# Altium PCB RF Board - Commercial China.PcbDoc
Units mil, origin at the board's own origin, x right, y up, seen from the top; angles counter-clockwise.
Board outline 2000 x 1000 mil, 2 copper layers (Top Layer, Bottom Layer); 17 components, 17 nets, 58 pads, 9 vias.
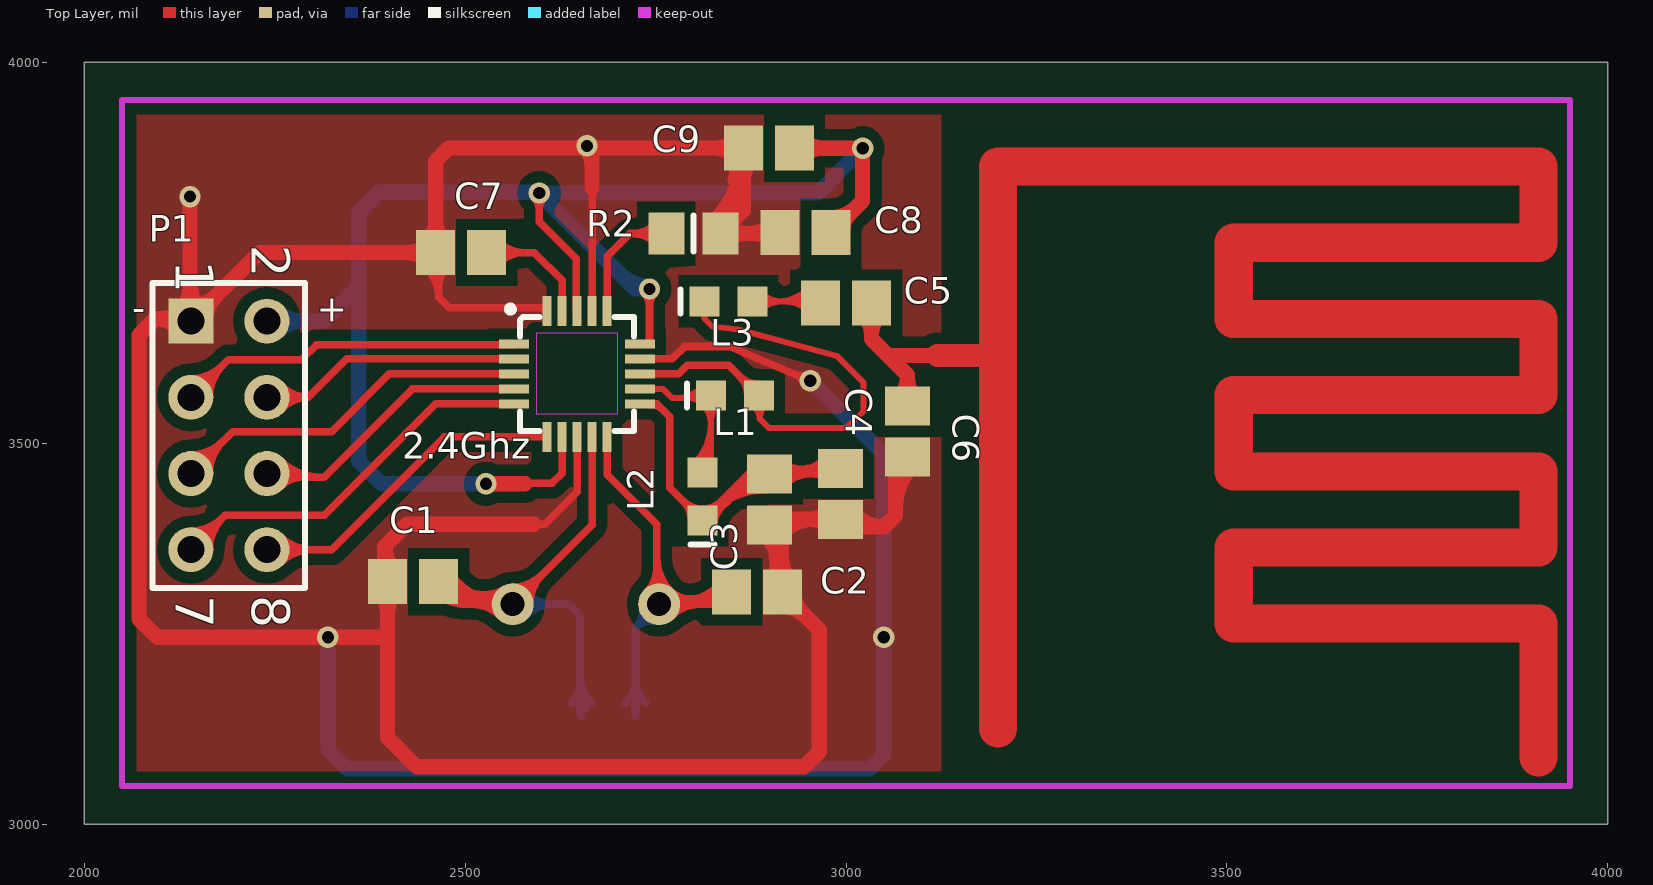
[diagram p0: Top Layer view]
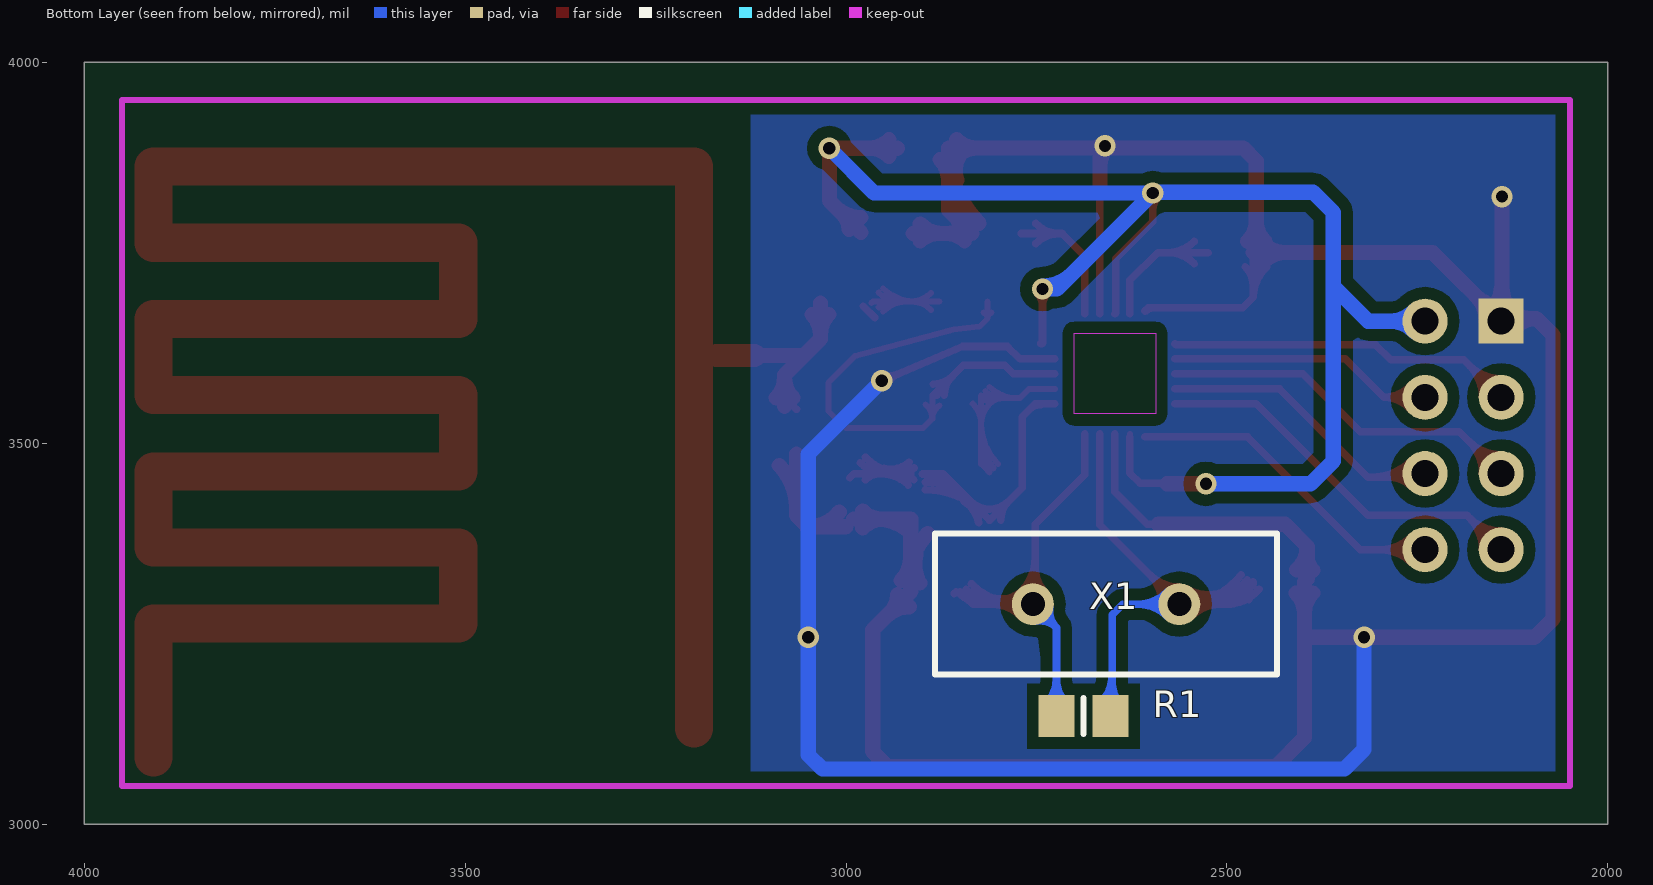
[diagram p1: Bottom Layer view, seen from below]

## Layer stack, top to bottom
Top Layer: signal copper 1.4
Dielectric: dielectric 12.6, FR-4, Dk 4.8
Bottom Layer: signal copper 1.4

## Board outline
2000,3000 4000,3000 4000,4000 2000,4000

## Design rules (kind name [scope] priority, off if disabled: settings)
Clearance "Polygon Clearance" [InPolygon] p1: gap=15
Clearance [All] p2: gap=8.1
HoleSize [All] p1: absolutevalues=TRUE maxlimit=100 minlimit=16 maxpercent=80.000 minpercent=20.000
MinimumAnnularRing [All] p1: minimumring=6
PolygonConnect [All] p1: connectstyle=Direct reliefconductorwidth=10 reliefentries=4 polygonreliefangle="90 Angle"
RoutingVias [All] p1: holewidth=16 width=28 viastyle="Through Hole" minholewidth=16 minwidth=27 maxholewidth=16 maxwidth=35
SilkscreenOverComponentPads [All] p1: minsilkscreentomaskgap=10
SolderMaskExpansion [All] p1: expansion=4
Width [All] p1: maxlimit=50 minlimit=8 preferedwidth=8
26 further rules are at their usual default settings.

## Classes and differential pairs
component class "2.4Ghz Chip Board": P1
net class SPI[3..0]: SPI0 SPI1 SPI2 SPI3

## Components (designator, comment, footprint, x,y, rotation, side; value= is the part's Value field where it differs from the comment)
2.4Ghz "nRF24L01+" nRF24L01+ 2576.16,3630.12 r0 top (schematic designator "2.4Ghz Chip")
C1 "Cap Semi" CAPC2012N 2431.81,3318.02 r0 top
C2 "Cap Semi" CAPC2012N 2883.35,3304.68 r180 top
C3 "Cap Semi" CAPC2012N 2899.64,3425.9 r90 top
C4 "Cap Semi" CAPC2012N 2992.87,3433.15 r90 top
C5 "Cap Semi" CAPC2012N 3000.12,3683.85 r180 top
C6 "Cap Semi" CAPC2012N 3080.62,3514.92 r90 top
C7 "Cap Semi" CAPC2012N 2495,3750 r0 top
C8 "Cap Semi" CAPC2012N 2946.88,3776.47 r0 top
C9 "Cap Semi" CAPC2012N 2899.02,3887.01 r0 top
L1 "Inductor" INDC1608N 2854.06,3562.65 r0 top
L2 "Inductor" INDC1608N 2811.58,3430.04 r90 top
L3 "Inductor" INDC1608N 2845.77,3685.93 r0 top
P1 "Header 4X2" HDR2X4 2140,3660 r270 top
R1 "Res2" RESC2012N 2688.35,3141.5 r0 bottom
R2 "Res3" RESC2012N 2799.53,3775 r0 top
X1 "16Mhz" "HC-49U - Through Hole" 2658.63,3288.52 r0 bottom

## Footprints (in the part's own frame and the unit in brackets; to place one, negate y for a bottom-side part, rotate by r counter-clockwise, add the part's x,y. Pads: shape width x height; smd on the part's side, far side on the other; paste and mask are expansions set on the pad)
CAPC2012N [mm] "Chip Capacitor, Body 2.0x1.3mm, IPC Medium Density"
  rect 1.3x1.5 smd: 1(-0.85,0) 2(0.85,0)
  body extent -1.1,-0.72 1.1,0.72, height 1.1
"HC-49U - Through Hole" [mm] "Quartz Crystal, Thru-Hole; 2 Leads; Body 11.35 x 4.65 x 13.46 mm (LxWxH max)"
  round 1.4 hole 0.8: 1(-2.44,0) 2(2.44,0)
  silkscreen extent -5.7,-2.35 5.7,2.35
HDR2X4 [mm] "Connector; Header; 4x2 Position"
  rect 1.5x1.5 hole 0.9: 1(0,0)
  round 1.5 hole 0.9: 2(0,2.54) 3(2.54,0) 4(2.54,2.54) 5(5.08,0) 6(5.08,2.54) 7(7.62,0) 8(7.62,2.54)
  silkscreen extent -1.27,-1.27 8.89,3.81
INDC1608N [mm] "Chip Inductor, Body 1.6x0.8mm, IPC Medium Density"
  rect 1x1 smd: 1(-0.8,0) 2(0.8,0)
  silkscreen extent -1.6,-0.4 -1.6,0.4, body extent -0.87,-0.48 0.87,0.48, height 0.71
nRF24L01+ [mm]
  rect 1x0.29 smd: 1(-0.3,0) 2(-0.3,-0.5) 3(-0.3,-1) 4(-0.3,-1.5) 5(-0.3,-2) 11(3.9,-2) 12(3.9,-1.5) 13(3.9,-1) 14(3.9,-0.5) 15(3.9,0)
  rect 0.29x1 smd: 6(0.8,-3.1) 7(1.3,-3.1) 8(1.8,-3.1) 9(2.3,-3.1) 10(2.8,-3.1) 16(2.8,1.1) 17(2.3,1.1) 18(1.8,1.1) 19(1.3,1.1) 20(0.8,1.1)
  Keep-Out Layer region: 0.447,-2.334 3.152,-2.334 3.152,0.357 0.447,0.357
  silkscreen extent -0.49,-2.9 3.7,1.22
RESC2012N [mm] "Chip Resistor, Body 2.0x1.3mm, IPC Medium Density"
  rect 1.2x1.4 smd: 1(-0.9,0) 2(0.9,0)
  silkscreen extent 0,-0.6 0,0.6, body extent -1.07,-0.7 1.07,0.7, height 0.65

## Part data
C1 C2 C3 C4 C5 C6 C7 C8 C9: "Capacitor (Semiconductor SIM Model)"
P1: "Header, 4-Pin, Dual row"
R1 R2: "Resistor"
X1: library part XTAL, "Crystal Oscillator"

## Via types
v1: diameter 28, hole 16, Top Layer to Bottom Layer, 9 vias

## Nets (pads, with @x,y where several pads share a name; then routed paths per layer and width w, separated by ;. In a path a pad name is that pad's centre, name@x,y a point inside that pad or via, vN(x,y) a via of type N, cw(c..) or ccw(c..) an arc to the next point about the centre after c; other vN are vias at no path point)
3.3VCC: 2.4Ghz.7 2.4Ghz.15 2.4Ghz.18 C8.2 C9.2 P1.2 | length 2481.3
  Top Layer w8: 2.4Ghz.7 2.4Ghz.7@2627.34,3512.01
  Top Layer w10: 2579.2,3446.99 2614.06,3446.99 2627.34,3460.27 2.4Ghz.7 ; v1@2590.93,3821.77 cw(c2575.56,3806.4) 2597.29,3806.4 cw(c2619.02,3806.4) v1@2603.65,3821.77 ; v1(2597.29,3828.13) 2597.29,3790.56 2646.15,3741.7 2646.15,3670.37 2.4Ghz.18@2647.03,3669.49 ; v1@2735.72,3695.78 cw(c2720.35,3680.41) 2742.08,3680.41 cw(c2763.81,3680.41) v1@2748.44,3695.78 ; 2.4Ghz.15@2742.08,3635.69 ccw(c2749.25,3635.69) 2.4Ghz.15@2744.18,3630.62 ; v1(2742.08,3702.14) 2742.08,3631.08 2.4Ghz.15@2743.04,3630.12 ; v1@3021.77,3887.01 v1(3021.88,3886.9)
  Top Layer w20: v1(2527.51,3446.52) 2578.73,3446.52 ; C9.2 3021.77,3887.01 3021.77,3817.9 C8.2 ; C9.2@2943.51,3875.99 cw(c2970.12,3849.37) 2970.12,3887.01 cw(c2970.12,3924.65) C9.2@2943.51,3898.03 ; C8.2@2980.34,3796 ccw(c2980.34,3843.14) 3013.68,3809.81 ; C8.2@2995.94,3780.41 cw(c3024.07,3780.41) C8.2@3004.18,3800.3
  Bottom Layer w20: P1.2@2245,3665 P1.2 2314.81,3660 2360.4,3705.59 ; P1.2@2253.81,3646.19 cw(c2287.14,3612.86) 2287.14,3660 cw(c2287.14,3707.14) P1.2@2253.81,3673.81 ; v1(2527.51,3446.52) 2390.27,3446.52 2360.4,3476.39 2360.4,3705.59 ; 2703.16,3722.26 ccw(c2742.08,3761.18) v1@2742.08,3706.14 ; v1(2742.08,3702.14) 2723.28,3702.14 v1(2597.29,3828.13) ; v1(3021.88,3886.9) 2963.11,3828.13 v1(2597.29,3828.13) ; 2360.4,3705.59 2360.4,3802.76 2386.94,3829.3 2596.12,3829.3 v1(2597.29,3828.13)
CE: 2.4Ghz.1 P1.3 | length 605.4
  Top Layer w10: P1.3 2189.34,3609.34 2285.16,3609.34 2305.06,3629.24 2567.41,3629.24 2.4Ghz.1@2568.29,3630.12 ; P1.3@2140,3574.53 ccw(c2140,3609.6) 2164.8,3584.8 ccw(c2189.6,3560) P1.3@2154.53,3560 ; P1.3@2140,3584.53 ccw(c2140,3643.74) 2181.87,3601.87 ccw(c2223.74,3560) P1.3@2164.53,3560
GND: 2.4Ghz.8 2.4Ghz.14 2.4Ghz.17 2.4Ghz.20 C1.1 C2.1 C3.1 C4.1 C6.1 C7.1 C8.1 C9.1 P1.1 R2.2 | length 7561.2
  Top Layer w10: C7.1@2447.86,3730.67 cw(c2413.02,3691.46) 2465.47,3691.46 ; C7.1@2454.5,3738.15 cw(c2432.8,3713.72) 2465.47,3713.72 ; 2465.47,3705.86 cw(c2501.74,3705.86) C7.1@2476.1,3731.5 ; C7.1@2465.47,3750 2465.47,3691.6 2479.38,3677.69 2603.39,3677.69 2.4Ghz.20 ; 2590.13,3393.53 2604.63,3393.53 2647.03,3435.93 2.4Ghz.8 2.4Ghz.8@2647.03,3512.01 ; 2595.65,3677.69 cw(c2595.65,3661.42) 2.4Ghz.20@2607.16,3672.93 ; 2.4Ghz.17@2666.71,3669.49 2.4Ghz.17 2666.71,3835 ; 2.4Ghz.14@2725.77,3610.43 2.4Ghz.14 2771.89,3610.43 2788.11,3626.66 2847.13,3626.66 2847.19,3626.59 v1(2953.17,3581.7) ; C8.1@2911.95,3775 C8.1 ; C2.1@2914.53,3305 C2.1@2915,3305.47 ; v1@2944.83,3578.32 ccw(c2924.69,3570.17) 2933.16,3590.18 ccw(c2941.64,3610.18) v1@2949.79,3590.04 ; C4.1@2990,3400.47 C4.1@3000.47,3390
  Top Layer w20: 2100.85,3663.31 ccw(c2100.85,3699.15) 2126.19,3673.81 ccw(c2095.27,3704.73) 2139,3704.73 ; P1.1@2124.5,3648.12 ccw(c2093.71,3624.51) 2093.71,3663.31 ; 2139,3709.56 ccw(c2189.56,3709.56) P1.1@2153.81,3673.81 ; v1(2139,3823.46) P1.1@2139,3661 ; P1.1@2140,3679.53 ccw(c2140,3726.67) 2173.34,3693.34 ccw(c2206.67,3660) P1.1@2159.53,3660 ; C1.1@2387.32,3303.06 cw(c2360.71,3276.44) 2398.35,3276.44 cw(c2435.98,3276.44) C1.1@2409.37,3303.06 ; C1.1@2387.32,3332.98 ccw(c2369.75,3350.55) 2394.6,3350.55 ; C1.1@2408.57,3333.73 cw(c2435.19,3364.37) 2394.6,3364.37 ; 2423.75,3393.52 2394.6,3364.37 ; 2423.75,3393.53 2590.13,3393.53 ; C7.1@2450.51,3738.98 ccw(c2423.9,3712.36) 2423.9,3750 ccw(c2423.9,3787.64) C7.1@2450.51,3761.02 ; C7.1@2450.51,3764.96 ccw(c2423.9,3791.58) 2461.54,3791.58 ccw(c2499.17,3791.58) C7.1@2472.56,3764.96 ; C7.1@2465.47,3750 C7.1 ; 2643.41,3887.13 ccw(c2643.41,3906.59) v1@2657.17,3892.83 ; v1@2657.17,3887.17 cw(c2634.14,3864.14) 2666.71,3864.14 ; v1@2662.83,3892.83 ccw(c2676.59,3906.59) 2676.59,3887.13 ; 2666.71,3835 2666.71,3883.29 v1@2662.87,3887.13 ; R2.2@2825.33,3788.57 ccw(c2728.21,3885.69) C9.1@2865.56,3885.69 ; 2827.63,3887.13 cw(c2827.63,3849.08) C9.1@2854.53,3875.99 ; 2828.21,3887.13 ccw(c2828.21,3924.36) C9.1@2854.53,3898.03 ; R2.2@2834.96,3792.56 ccw(c2834.96,3834.95) 2864.94,3804.98 ; R2.2@2839.47,3774.43 ccw(c2776.5,3837.4) 2865.56,3837.4 ; R2.2@2844.59,3765.37 cw(c2867.85,3742.11) 2867.85,3775 cw(c2867.85,3807.89) R2.2@2844.59,3784.63 ; R2.2@2848.58,3778.94 cw(c2871.96,3778.94) R2.2@2855.43,3795.47 ; C9.1@2852.05,3875.28 cw(c2821.46,3857.61) 2855.58,3848.47 ; C9.1@2854.53,3872.05 cw(c2827.92,3845.43) 2865.56,3845.43 cw(c2903.19,3845.43) C9.1@2876.58,3872.05 ; 2854.74,3845.31 cw(c2893.32,3834.98) C9.1@2873.35,3869.57 ; 2872.23,3775 ccw(c2872.23,3817.66) C8.1@2902.39,3787.49 ; 2879.33,3775 cw(c2879.33,3742.38) C8.1@2902.39,3765.45 ; C3.1@2892.55,3381.41 cw(c2838.36,3327.22) C2.1@2915,3327.22 ; C2.1@2903.31,3316.41 ccw(c2861.66,3340.46) 2908.12,3352.91 ; C2.1@2905.79,3319.64 ccw(c2883.56,3341.88) 2915,3341.88 ; 2911.94,3338.63 ccw(c2938.2,3345.66) C2.1@2924.61,3322.12 ; C8.1@2911.95,3775 R2.2 2865.56,3805.59 C9.1 2865.44,3887.13 v1@2662.87,3887.13 ; C2.1@2914.53,3305 2965,3254.53 2965,3095 2945,3075 2436.63,3075 2398.35,3113.28 2398.35,3244.28 ; C3.1@2914.6,3381.41 cw(c2960.62,3335.39) 2960.62,3400.47 ; C2.1@2915,3305.47 2915,3400.47 C4.1@2990,3400.47 ; 2915,3350.64 ccw(c2958.83,3350.64) C2.1@2927.84,3319.64 ; C2.1@2916.81,3285.15 cw(c2916.81,3242.76) 2946.79,3272.74 ; C2.1@2932.41,3300.74 ccw(c2965.29,3300.74) C2.1@2942.04,3277.49 ; 2949.39,3400.47 cw(c2949.39,3360.15) C4.1@2977.91,3388.66 ; 2953.19,3400.47 ccw(c2953.19,3435.42) C4.1@2977.91,3410.71 ; C4.1@3000.47,3390 3050,3390 ; C4.1@3008.89,3409.53 ccw(c3050,3443.01) 3050,3390 ; 3065,3415.61 cw(c3142.53,3415.61) C6.1@3087.71,3470.43 ; C6.1@3065,3485.47 3065,3405 3050,3390 ; 2093.71,3663.31 2136.69,3663.31 P1.1@2139,3661 ; 2093.71,3663.31 2072.1,3641.7 2072.1,3269.2 2096.3,3245 v1(2320,3245) 2397.63,3245 2398.35,3244.28 ; P1.1@2139,3661 2131.71,3653.71 P1.1 ; P1.1@2139,3661 P1.1 ; P1.1 2230,3750 C7.1 ; 2394.6,3364.37 2394.6,3321.77 C1.1 2398.35,3244.28 ; C7.1 2461.54,3870.29 2478.38,3887.13 v1@2660,3887.13 ; v1@2660,3887.13 v1(2660,3890) v1@2662.87,3887.13 ; v1@2660,3887.13 v1@2662.87,3887.13
  Bottom Layer w20: v1(2320,3245) 2320,3097.79 2345.69,3072.1 3030.85,3072.1 3049.61,3090.86 v1(3049.61,3245.14) 3049.61,3485.26 v1(2953.17,3581.7)
IRQ: 2.4Ghz.6 P1.8 | length 577.1
  Top Layer w10: P1.8 2325,3360 2473.07,3508.07 2.4Ghz.6 ; P1.8@2250.27,3349.73 cw(c2275.07,3324.93) 2275.07,3360 cw(c2275.07,3395.07) P1.8@2250.27,3370.27 ; P1.8@2257.34,3342.66 cw(c2299.21,3300.79) 2299.21,3360 cw(c2299.21,3419.21) P1.8@2257.34,3377.34
"Net2.4Ghz Chip_9": 2.4Ghz.9 C1.2 R1.1 X1.1 | length 1649.9
  Top Layer w10: C1.2@2457.99,3308.13 ccw(c2499.32,3341.89) 2499.32,3288.52 ; C1.2 2494.77,3288.52 ; C1.2@2465.73,3314.46 ccw(c2520.4,3359.11) 2520.4,3288.52 ; C1.2@2471.28,3294.39 cw(c2478.14,3271.89) 2494.77,3288.52 ; C1.2@2473.48,3320.78 ccw(c2541.48,3376.33) X1.1@2541.48,3288.52 ; C1.2@2481.22,3327.11 ccw(c2562.56,3393.54) X1.1 ; C1.2@2485.81,3312.59 ccw(c2516.61,3310.35) 2494.77,3288.52 ; 2515.43,3294.05 ccw(c2522.15,3325.7) X1.1@2545.97,3303.79 ; 2518.73,3293.35 cw(c2510.52,3254.71) X1.1@2543.65,3276.23 ; 2532.59,3290.41 ccw(c2537.16,3311.9) X1.1@2553.32,3297.02 ; X1.1@2543.02,3277.26 ccw(c2496.02,3250.2) 2510.05,3302.59 ccw(c2524.09,3354.97) X1.1@2551.26,3308.04 ; X1.1@2546.62,3272.57 ccw(c2508.1,3234.06) 2508.1,3288.52 ccw(c2508.1,3342.98) X1.1@2546.62,3304.47 ; X1.1@2551.68,3282.25 ccw(c2525.52,3267.19) 2533.33,3296.35 ccw(c2541.14,3325.51) X1.1@2556.27,3299.39 ; X1.1@2553.69,3279.64 ccw(c2532.25,3258.2) 2532.25,3288.52 ccw(c2532.25,3318.84) X1.1@2553.69,3297.4 ; X1.1@2562.57,3301.08 ccw(c2562.57,3331.4) 2584.01,3309.96 ccw(c2605.45,3288.52) X1.1@2575.13,3288.52 ; X1.1@2562.57,3311.08 ccw(c2562.57,3365.54) 2601.08,3327.03 ccw(c2639.59,3288.52) X1.1@2585.13,3288.52 ; 2.4Ghz.9@2666.71,3512.01 2.4Ghz.9 2666.71,3392.66 X1.1 ; 2494.77,3288.52 X1.1
  Bottom Layer w10: X1.1 2636.8,3288.52 2650.45,3274.87 2650.45,3143.97 R1.1 ; X1.1@2571.45,3279.64 cw(c2592.89,3258.2) 2592.89,3288.52 cw(c2592.89,3318.84) X1.1@2571.45,3297.4 ; X1.1@2578.52,3272.57 cw(c2617.03,3234.06) 2617.03,3288.52 cw(c2617.03,3342.98) X1.1@2578.52,3304.47 ; R1.1@2639.75,3158.6 ccw(c2613.92,3184.44) 2650.45,3184.44 ; 2650.45,3172.21 ccw(c2679.69,3172.21) R1.1@2659.01,3151.53 ; 2650.45,3196.35 ccw(c2703.83,3196.35) R1.1@2666.08,3158.6
"Net2.4Ghz Chip_10": 2.4Ghz.10 C2.2 R1.2 X1.2 | length 1150.1
  Top Layer w10: 2.4Ghz.10@2686.4,3512.01 2.4Ghz.10 2686.4,3458.6 2751.59,3393.41 2751.59,3291.63 X1.2 2833.73,3288.52 C2.2 ; X1.2@2738.74,3304.47 ccw(c2707.73,3335.48) 2751.59,3335.48 ; 2751.59,3326.34 ccw(c2792.52,3326.34) 2763.57,3297.4 ccw(c2785.01,3318.84) 2785.01,3288.52 ccw(c2785.01,3258.2) X1.2@2763.57,3279.64 ; 2751.59,3350.49 ccw(c2816.66,3350.49) 2770.64,3304.47 ccw(c2809.16,3342.98) 2809.16,3288.52 ccw(c2809.16,3234.06) X1.2@2770.64,3272.57 ; X1.2@2763.15,3297.81 ccw(c2779.86,3316.15) 2785.5,3291.99 ; X1.2@2769.88,3305.2 ccw(c2795.4,3333.21) 2804.02,3296.31 ; X1.2@2770.67,3288.52 ccw(c2770.67,3379.96) C2.2@2835.33,3315.3 ; X1.2@2773.86,3276.62 cw(c2809.58,3254.42) 2800.01,3295.38 ; 2794.81,3288.52 ccw(c2794.81,3355.82) C2.2@2842.4,3308.23 ; 2818.95,3288.52 ccw(c2818.95,3331.68) C2.2@2849.47,3301.16 ; C2.2@2855.47,3305 C2.2@2857.99,3302.48
  Bottom Layer w10: R1.2@2710.62,3158.6 ccw(c2678.83,3190.39) 2723.78,3190.39 ccw(c2768.74,3190.39) R1.2@2736.95,3158.6 ; R1.2 2723.78,3257.61 ; X1.2@2732.45,3284.76 cw(c2701.82,3279.58) 2723.78,3257.61 ; X1.2@2750.93,3266.28 ccw(c2745.75,3235.64) 2723.78,3257.61 ; X1.2 2723.78,3257.61
"Net2.4Ghz Chip_11": 2.4Ghz.11 C3.2 C4.2 L2.1 | length 1076.6
  Top Layer w10: 2.4Ghz.11@2725.77,3551.38 2751.83,3551.38 2768.58,3534.63 2768.58,3441.54 L2.1 2872.4,3459.36 C3.2 ; 2.4Ghz.11@2743.68,3550.67 cw(c2743.68,3529.28) 2758.8,3544.41 ; L2.1@2796.89,3398.54 ccw(c2761.44,3398.54) 2786.51,3423.61 ccw(c2811.58,3448.68) 2811.58,3413.23 ccw(c2811.58,3448.68) 2836.65,3423.61 ccw(c2861.72,3398.54) L2.1@2826.27,3398.54 ; L2.1@2814.63,3412.91 ccw(c2820.07,3438.59) 2834.38,3416.58 ; L2.1@2820.77,3407.74 cw(c2895.7,3332.81) C3.2@2895.7,3438.77 ; L2.1@2825.95,3395.5 cw(c2869.63,3386.24) 2845.29,3423.68 ; 2837.84,3424.81 cw(c2895.7,3366.95) C3.2@2895.7,3448.77 ; 2854.92,3441.88 cw(c2895.7,3401.09) C3.2@2895.7,3458.77 ; C3.2@2910.62,3467.27 ccw(c2926.17,3484.73) 2932.04,3462.1 ; C3.2@2911.07,3451.88 cw(c2929.54,3433.4) 2929.54,3459.53 ; C3.2@2915,3459.53 2990,3459.53 C4.2@2995,3454.53 ; C3.2@2917.27,3474.74 ccw(c2941.16,3501.56) 2950.16,3466.79 ; C3.2@2918.14,3444.8 cw(c2953.68,3409.26) 2953.68,3459.53 ; C3.2@2918.14,3473.92 ccw(c2952.89,3508.68) 2952.89,3459.53 ; C3.2@2921.32,3448.92 cw(c2950.95,3431.48) 2942.33,3464.76 ; C3.2@2922.11,3459.53 ccw(c2922.11,3533.43) C4.2@2974.37,3481.17 ; 2946.26,3459.53 ccw(c2946.26,3509.29) C4.2@2981.44,3474.1 ; 2956.33,3459.53 cw(c2956.33,3434.01) C4.2@2974.37,3452.05
"Net2.4Ghz Chip_12": 2.4Ghz.12 L1.1 L2.2 | length 489.8
  Top Layer w8: 2.4Ghz.12@2725.77,3571.07 2759.6,3571.07 2771.76,3558.9 L1.1@2818.81,3558.9 ; 2775.64,3558.9 ccw(c2775.64,3609.57) L1.1@2811.47,3573.74 ; 2793.75,3558.9 cw(c2793.75,3533.84) 2811.47,3551.56 cw(c2784.7,3524.78) 2822.56,3524.78 cw(c2860.43,3524.78) L1.1@2833.65,3551.56 ; 2794.96,3558.9 ccw(c2794.96,3590.26) L1.1@2817.13,3568.08 ; L2.2@2800.49,3472.63 ccw(c2747.2,3525.92) 2822.56,3525.92 ; L2.2@2806.15,3466.97 ccw(c2766.51,3506.61) 2822.56,3506.61 ; L2.2 2822.56,3472.52 L1.1 L1.1@2818.81,3558.9 ; L2.2@2811.8,3461.31 ccw(c2785.82,3487.29) 2822.56,3487.29 ; L1.1@2815.23,3555.32 L1.1@2818.81,3558.9
"Net2.4Ghz Chip_13": 2.4Ghz.13 L1.2 L3.1 | length 784.4
  Top Layer w8: L3.1@2808.85,3671.21 cw(c2805.97,3663.43) 2814.27,3663.43 ; L3.1 2814.27,3663.43 ; L3.1@2819.7,3671.21 ccw(c2822.57,3663.43) 2814.27,3663.43 ; L1.2@2877.08,3549.45 cw(c2865.81,3531.91) 2886.66,3531.91 cw(c2910.66,3531.91) L1.2@2895.48,3550.5 ; L1.2@2879.05,3562.65 2880.46,3562.65 L1.2 2886.66,3561.55 2886.66,3531.93 2898.77,3519.82 3000.89,3519.82 3023.13,3542.06 3023.13,3579.18 2987.86,3614.45 2858.77,3648.91 2824.77,3652.93 2814.27,3663.43
  Top Layer w10: 2.4Ghz.13@2725.77,3590.75 2780.68,3590.75 2791.88,3601.95 2846.26,3601.95 L1.2 L1.2@2880.46,3562.65 ; L1.2@2870.87,3562.65 ccw(c2835.42,3562.65) 2860.49,3587.72 ccw(c2885.56,3612.79) L1.2@2885.56,3577.34
"Net2.4Ghz Chip_16": 2.4Ghz.16 R2.1 | length 242.2
  Top Layer w10: 2.4Ghz.16@2686.4,3669.49 2686.4,3745.06 2716.34,3775 R2.1@2770,3775 ; R2.1@2750.93,3761.83 ccw(c2719.14,3730.04) 2719.14,3775 ccw(c2719.14,3819.96) R2.1@2750.93,3788.17
"Net2.4Ghz Chip_19": 2.4Ghz.19 C7.2 | length 240.1
  Top Layer w10: C7.2@2524.53,3750 2590.98,3750 2627.34,3713.64 2.4Ghz.19 2.4Ghz.19@2627.34,3669.49 ; C7.2@2543.02,3735.44 cw(c2578.17,3700.29) 2578.17,3750 cw(c2578.17,3799.71) C7.2@2543.02,3764.56
NetC5_1: C5.1 C6.2 | length 5018.3
  Top Layer w10: C6.2@3065,3544.53 C6.2@3070,3549.53
  Top Layer w20: C5.1@3022.56,3668.89 cw(c2995.95,3642.27) 3033.58,3642.27 cw(c3071.22,3642.27) C5.1@3044.61,3668.89 ; C5.1 3033.58,3636.42 3055,3615 ; C6.2@3069.6,3559.41 ccw(c3042.98,3586.02) 3080.62,3586.02 ccw(c3118.26,3586.02) C6.2@3091.64,3559.41 ; C6.2 3080.62,3589.38 3055,3615 ; 3120,3615 3055,3615
  Top Layer w30: 3120,3615 3170,3615
  Top Layer w50: 3199.28,3125.3 3199.28,3862.9 3908.95,3862.9 3908.95,3762.9 3508.95,3762.9 3508.95,3662.9 3908.95,3662.9 3908.95,3562.9 3508.95,3562.9 3508.95,3462.9 3908.95,3462.9 3908.95,3362.9 3508.95,3362.9 3508.95,3262.9 3908.95,3262.9 3908.95,3087.1
NetC5_2: C5.2 L3.2 | length 304.1
  Top Layer w8: L3.2 2964.58,3685.93 C5.2 ; L3.2@2888.36,3674.84 cw(c2915.13,3648.06) 2915.13,3685.93 cw(c2915.13,3723.8) L3.2@2888.36,3697.02 ; 2910.05,3685.93 ccw(c2910.05,3744.39) C5.2@2951.39,3703.05 ; 2919.01,3685.93 cw(c2919.01,3640.15) C5.2@2951.39,3672.52 ; 2929.36,3685.93 ccw(c2929.36,3725.08) C5.2@2957.05,3697.4 ; 2938.33,3685.93 cw(c2938.33,3659.46) C5.2@2957.05,3678.18
  Top Layer w10: C5.2@2962.42,3664.8 C5.2@2977.23,3679.61
SPI0: 2.4Ghz.2 P1.4 | length 478.6
  Top Layer w10: P1.4 2294.34,3560 ; P1.4@2250.9,3550.39 cw(c2272.18,3531.62) 2272.18,3560 cw(c2272.18,3588.38) P1.4@2250.9,3569.61 ; P1.4@2258.4,3543.78 cw(c2294.33,3512.09) 2294.33,3560 ; P1.4@2258.4,3576.22 ccw(c2294.33,3607.91) 2294.33,3560 ; 2.4Ghz.2@2568.29,3610.43 2344.77,3610.43 2294.34,3560
SPI1: 2.4Ghz.3 P1.5 | length 630.6
  Top Layer w10: P1.5 2195,3515 2325,3515 2400.75,3590.75 2.4Ghz.3@2568.29,3590.75 ; P1.5@2140,3474.53 ccw(c2140,3509.6) 2164.8,3484.8 ccw(c2189.6,3460) P1.5@2154.53,3460 ; P1.5@2140,3484.53 ccw(c2140,3543.74) 2181.87,3501.87 ccw(c2223.74,3460) P1.5@2164.53,3460
SPI2: 2.4Ghz.4 P1.6 | length 512.4
  Top Layer w10: P1.6 2245,3455 2315,3455 2431.07,3571.07 2.4Ghz.4@2568.29,3571.07 ; P1.6@2250.27,3470.27 ccw(c2287.14,3507.14) 2287.14,3455 ccw(c2287.14,3412.86) P1.6@2257.34,3442.66 ; P1.6@2257.34,3477.34 ccw(c2311.29,3531.29) 2311.29,3455
SPI3: 2.4Ghz.5 P1.7 | length 655.7
  Top Layer w10: P1.7 2185,3405 2315,3405 2461.38,3551.38 2.4Ghz.5@2568.29,3551.38 ; P1.7@2140,3374.53 ccw(c2140,3409.6) 2164.8,3384.8 ccw(c2189.6,3360) P1.7@2154.53,3360 ; P1.7@2140,3384.53 ccw(c2140,3443.74) 2181.87,3401.87 ccw(c2223.74,3360) P1.7@2164.53,3360

## Polygon pours and split planes (outlines as drawn)
GND on Top Layer "Top Layer-GND" (solid, pour order 4): 2025,3975 3125,3975 3125,3025 2025,3025
GND on Bottom Layer "Bottom Layer-No Net" (solid, pour order 2): 2025,3980 2030,3975 3125,3975 3125,3025 2025,3025

## Keep-outs
Keep-Out Layer:
  lines w8: 2050,3050 3950,3050 3950,3950 2050,3950 2050,3050

## Silkscreen, mask and mechanical layers (free items; w line width, h text height)
Top Overlay:
  text "-" at 2062.89,3649.58 h60
  text "+" at 2305.63,3647.36 h60
Mechanical 4:
  lines w10: 2050,3050 2050,3950 3950,3950 3950,3050 2050,3050
Drill Drawing:
  text ".LEGEND" at 4200,3200 h60
  text "Drill Drawing." at 4200,3100 h60

## Dimensions
2050,3050 to 3950,3050 on Mechanical 1
2050,3050 to 2050,3950 on Mechanical 1

## Text inside footprints (layer, text, board x,y; h text height)
P1: Top Overlay "8" at 2220,3300 h50 r270; Top Overlay "7" at 2120,3300 h50 r270; Top Overlay "1" at 2120,3740 h50 r270; Top Overlay "2" at 2220,3760 h50 r270